# Altium PCB Mini_PD.PcbDoc
Units mil, origin at the board's own origin, x right, y up, seen from the top; angles counter-clockwise.
Board outline 551.18 x 429.13 mil, 2 copper layers (Top Layer, Bottom Layer); 9 components, 9 nets, 70 pads, 9 vias.
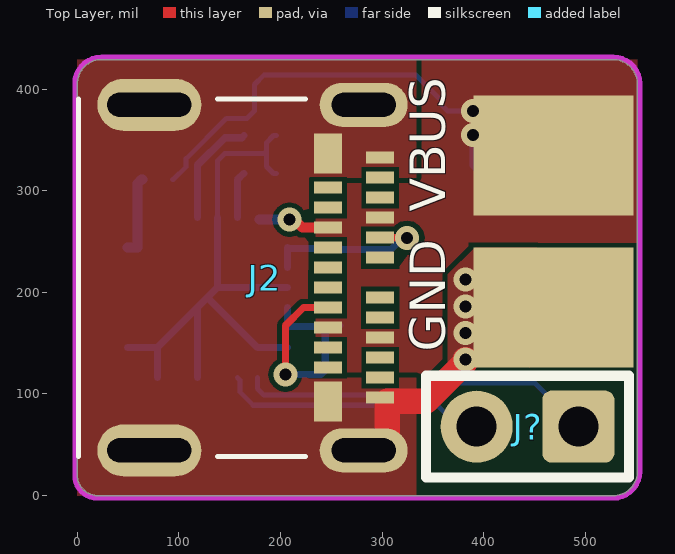
[diagram p0: Top Layer view]
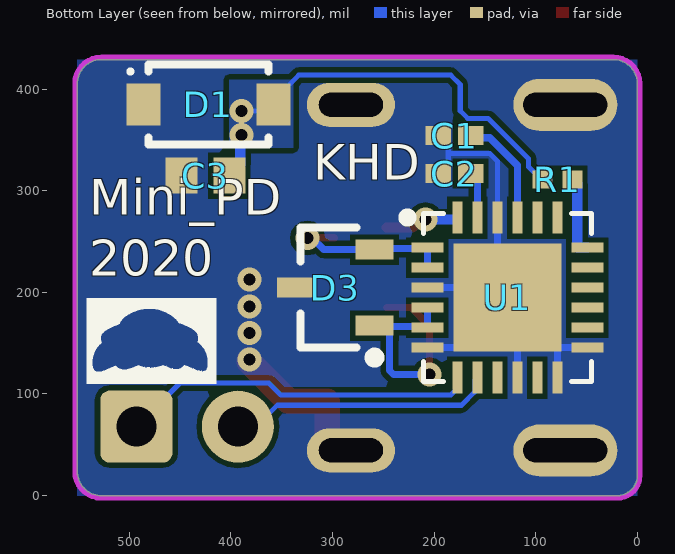
[diagram p1: Bottom Layer view, seen from below]
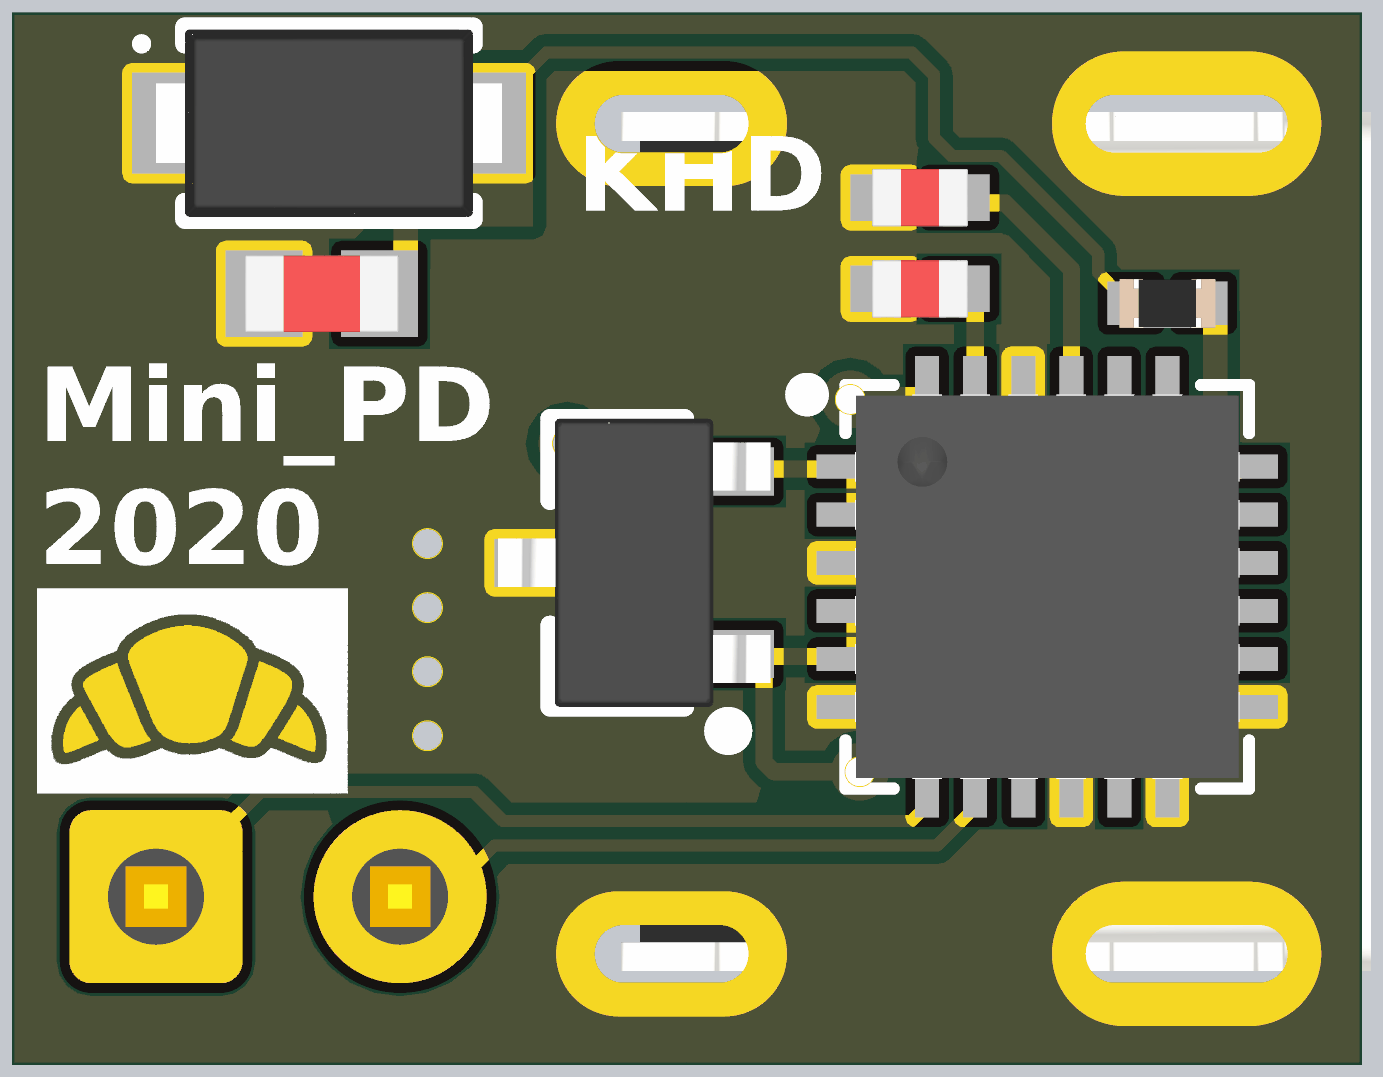
[diagram p2: 3D render of the assembled board from below, using the file's embedded part models]

## Layer stack, top to bottom
Top Solder: solder mask 0.4, Solder Resist, Dk 3.5
Top Layer: signal copper 1.4
Dielectric 1: dielectric 12.6, FR-4, Dk 4.8
Bottom Layer: signal copper 1.4
Bottom Solder: solder mask 0.4, Solder Resist, Dk 3.5

## Board outline
19.68,0 527.56,0 ccw(c527.56,23.62) 551.18,23.62 551.18,405.51 ccw(c527.56,405.51) 527.56,429.13 23.62,429.13 ccw(c23.62,405.52) 0,405.51 0,19.69 ccw(c19.68,19.68)

## Design rules (kind name [scope] priority, off if disabled: settings)
Clearance [All] p1: gap=5 ignorepadtopadclearanceinfootprint=FALSE
PolygonConnect PolygonConnect_1 [All vs IsNamedPolygon('NONET_L-01_P-001')] p1: connectstyle=Direct reliefconductorwidth=10 reliefentries=4 polygonreliefangle="90 Angle" airgapwidth=10
PolygonConnect [All] p2: connectstyle=Relief reliefconductorwidth=10 reliefentries=4 polygonreliefangle="90 Angle" airgapwidth=10
RoutingVias [All] p1: holewidth=19.68 width=31.5 viastyle="Through Hole" minholewidth=11.81 minwidth=23.62 maxholewidth=15.75 maxwidth=27.56
SolderMaskExpansion [All] p1: expansion=4 istentingtop=FALSE
Width [All] p1: maxlimit=25 minlimit=5 preferedwidth=7
30 further rules are at their usual default settings.

## Components (designator, comment, footprint, x,y, rotation, side; value= is the part's Value field where it differs from the comment)
C1 "C0402 1uF 6.3V X7R" C0402-HIGH-DENSITY 180.12,354.33 r180 bottom value=1uF
C2 "C0402 1uF 6.3V X7R" C0402-HIGH-DENSITY 180.12,316.93 r180 bottom value=1uF
C3 "4.7uF, 25V, X5R, 0603" C0603-HIGH-DENSITY 425.2,314.96 r180 bottom value=4.7uF
D1 "SMF22A" SOD-123F 422.24,384.84 r180 bottom value=24.4V
D3 "ESDA25L" SOT23-3L 297.24,204.72 r0 bottom
J2 "USB C" "Molex USB-C" 149.61,214.57 r270 top
J? "Header 1X2" "Header 1x2 TH Pitch 2.54mm" 493.11,67.91 r180 top
R1 "R0402 1k 1%" R0402-HIGH-DENSITY 78.74,311.02 r0 bottom value=1k
U1 "STUSB4500" "QFN24 - 4X4MM - PITCH 0.5MM - EXPOSEDPAD" 127.95,194.88 r180 bottom

## Footprints (in the part's own frame and the unit in brackets; to place one, negate y for a bottom-side part, rotate by r counter-clockwise, add the part's x,y. Pads: shape width x height; smd on the part's side, far side on the other; paste and mask are expansions set on the pad)
C0402-HIGH-DENSITY [mil] "Chip Capacitor, 2-Leads, Body 1.02x0.51mm, IPC High Density"
  rect 25x19 smd: 1(-16,0) 2(16,0)
  body extent -20,-12 20,12, height 8
C0603-HIGH-DENSITY [mm] "Chip Capacitor, 2-Leads, Body 1.60x0.80mm, IPC High Density"
  rect 0.8x0.9 smd: 1(-0.6,0) 2(0.6,0)
  body extent -0.8,-0.4 0.8,0.4, height 0.3
"Header 1x2 TH Pitch 2.54mm" [mm] "PinHeader 1x2 TH Pitch 2.54mm"
  rrect25% 1.8x1.8 hole 1: 1(0,0)
  round 1.8 hole 1: 2(2.54,0)
  silkscreen extent -1.27,-1.27 3.81,1.27, body extent -1.27,-1.27 3.81,1.27, height 9.5
"Molex USB-C" [mm] "MOLEX_105450-0101"
  rect 0.3x0.7 smd: A1(-3,3.77) A2(-2.5,3.77) A3(-2,3.77) A4(-1.5,3.77) A5(-1,3.77) A6(-0.5,3.77) A7(0.5,3.77) A8(1,3.77) A9(1.5,3.77) A10(2,3.77) A11(2.5,3.77) A12(3,3.77) B2(2.25,2.47) B3(1.75,2.47) B4(1.25,2.47) B5(0.75,2.47) B6(0.25,2.47) B7(-0.25,2.47) B8(-0.75,2.47) B9(-1.25,2.47) B10(-1.75,2.47) B11(-2.25,2.47)
  rect 1x0.7 smd: B1(3.1,2.47) B12(-3.1,2.47)
  oval 1.1x2.2 hole 0.6 slot 1.6 at 90 deg: S1(-4.32,3.36) S2(4.32,3.36)
  oval 1.3x2.6 hole 0.6 slot 2.1 at 90 deg: S3(-4.32,-2) S4(4.32,-2)
  silkscreen extent -4.47,-3.77 4.47,1.9, body extent -4.44,-3.92 4.5,3.98, height 3.22
"QFN24 - 4X4MM - PITCH 0.5MM - EXPOSEDPAD" [mm] "QFN24 - 4X4mm - pitch 0.5mm - ExposedPAD"
  rect 2.7x2.7 smd: 0(0,0)
  rect 0.8x0.25 smd: 1(-2,1.25) 2(-2,0.75) 3(-2,0.25) 4(-2,-0.25) 5(-2,-0.75) 6(-2,-1.25) 13(2,-1.25) 14(2,-0.75) 15(2,-0.25) 16(2,0.25) 17(2,0.75) 18(2,1.25)
  rect 0.25x0.8 smd: 7(-1.25,-2) 8(-0.75,-2) 9(-0.25,-2) 10(0.25,-2) 11(0.75,-2) 12(1.25,-2) 19(1.25,2) 20(0.75,2) 21(0.25,2) 22(-0.25,2) 23(-0.75,2) 24(-1.25,2)
  silkscreen extent -2.6,-2.1 2.1,2.1, body extent -2,-2 2,2, height 1
R0402-HIGH-DENSITY [mm] "Chip Resistor, 2-Leads, Body 1.00x0.50mm, IPC High Density"
  rect 0.5x0.45 smd: 1(-0.375,0) 2(0.375,0)
  body extent -0.5,-0.26 0.5,0.25, height 0.34
SOD-123F [mm] "SODFL, 2-Leads, Body 1.72x3.60mm, IPC High Density"
  rect 0.85x1.05 smd: A(-1.625,0) K(1.625,0)
  silkscreen extent -2,-1 1.5,1, body extent -1.8,-0.98 1.8,0.97, height 1.08
SOT23-3L [mm] "SOT23, 3-Leads, Body 2.90x2.55mm, Pitch 0.95mm, IPC Medium Density"
  rect 0.95x0.5 smd: 1(-0.98,0.95) 2(-0.98,-0.95) 3(0.98,0)
  silkscreen extent -1.1,-1.5 0.87,1.87, body extent -1.42,-1.5 1.42,1.5, height 1.2

## Part data
C1 C2: "Chip Capacitor, 0402, 1uF, 6.3V, X7R", Max. Voltage=6.3V, Supplier Part Number 1=490-13339-1-ND, EIA Code=X7R, Supplier 1=Digi-Key
C3: library part "C0603 4.7uF 25V X5R", "Chip Capacitor, 0603, 4.7uF, 25V, X5R", Max. Voltage=25V, Supplier Part Number 1=490-7203-1-ND, EIA Code=X5R, Supplier 1=Digi-Key, Supplier 2=Mouser, Supplier 3=LCSC, Supplier Part Number 2=81-GRM188R61E475KE1D, Supplier Part Number 3=C90057
D1: "Unidirectional 22V 24.4V 35.5V 5.6A SOD-123F TVS RoHS", Manufacturer="Littlefuse Inc.", Supplier Part Number 1=F5822CT-ND, Manufacturer’s ordering code=SMF22A, Part Number=SMF22A, Supplier 1=Digi-Key, Supplier 2=Mouser, Supplier 3=LCSC, Supplier Part Number 2=576-SMF22A, Supplier Part Number 3=C169431
D3: "Dual Transil Array For ESD Protection in SOT23-3 Vbr = 25V", Manufacturer=STMicroelectronics, Supplier Part Number 1=497-4642-1-ND, Manufacturer Part Number=ESDA25L, Supplier 1=Digi-Key, Supplier 2=Mouser, Supplier 3=LCSC, Supplier Part Number 2=511-ESDA25L, Supplier Part Number 3=C95343
J2: "USB-C USB 3.1 Gen 2, Superspeed+_ Receptacle Connector 24 Position Surface Mount, Right Angle; Through Hole", Package=None, Supplier Part Number 1=WM12856CT-ND, Digi-Key_Part_Number=WM12856CT-ND, Digi-Key_Purchase_URL=https://www.digikey.tw/product-detail/en/molex/1054500101/WM12856CT-ND/5843891?utm_source=snapeda&utm_medium=aggregator&utm_campaign=symbol, MF=Molex, MP=1054500101, SnapEDA_Link=https://www.snapeda.com/parts/1054500101/Molex/view-part/448528/?ref=snap, Supplier 1=Digi-Key, Supplier 2=Mouser, Supplier 3=LCSC, Supplier Part Number 2=538-105450-0101, Supplier Part Number 3=C134092
R1: "Chip Resistor, 0402, 1k ohms, 1%, 1/16 W", Supplier Part Number 1=311-1.00KLRCT-ND, Supplier 1=Digi-Key
U1: library part STUSB4500QTR, "Standalone USB PD controller  with SINK auto-run mode in QFN24 4x4mm", Manufacturer=STMicroelectronics, Supplier Part Number 1=497-18060-1-ND, Manufacturer’s ordering code=STUSB4500QTR, Part Number="Standalone USB PD controller  with SINK auto-run mode in QFN24 4x4mm", Supplier 1=Digi-Key, Supplier 2=Mouser, Supplier Part Number 2=511-STUSB4500QTR

## Free pads (board coordinates)
  rect 157.48x118.11 smd: 2(468.5,185.04) 2(468.5,334.65)

## Via types
v1: diameter 23.62, hole 11.81, Top Layer to Bottom Layer, tented both sides, 9 vias

## Nets (pads, with @x,y where several pads share a name; then routed paths per layer and width w, separated by ;. In a path a pad name is that pad's centre, name@x,y a point inside that pad or via, vN(x,y) a via of type N, cw(c..) or ccw(c..) an arc to the next point about the centre after c; other vN are vias at no path point)
CC1: D3.2 J2.A5 U1.1 U1.2 | length 170.2
  Top Layer w7: J2.A5 298.2,253.77 324.41,253.77 v1(324.58,253.6)
  Bottom Layer w7: U1.2 U1.1 207.68,243.11 258.17,243.11 258.66,243.6 260.14,242.13 308.61,242.13 320.08,253.6 v1(324.58,253.6)
CC2: D3.1 J2.B5 U1.4 U1.5 | length 256.2
  Top Layer w7: v1(204.72,119.09) 204.72,167.19 222.57,185.04 J2.B5
  Bottom Layer w7: v1(204.72,119.09) 239.9,119.09 244,123.2 244,161.52 D3.1@248.82,166.34 ; U1.4 U1.5 207.68,166.34 D3.1@248.82,166.34 ; D3.1 257.68,166.34 D3.1@248.82,166.34
GND: C1.1 C2.1 C3.1 D1.A D3.3 J2.A1 J2.A12 J2.B1 J2.B12 J2.S1 J2.S2 J2.S3 J2.S4 pad.2@468.5,185.04 U1.0 U1.3 U1.6 U1.10 U1.12 U1.13 U1.22 | length 767.1
  Top Layer w25: J2.S2 296.56,44.49 305.02,52.95 305.02,92.74 343.07,92.74 381.89,131.55 v1(381.89,133.86)
  Bottom Layer w5: U1.22 137.79,329.22 145.2,336.63 184.17,336.63 186.12,338.57 ; C2.1 193.12,316.93 186.12,323.93 186.12,338.57 ; C1.1 193.12,354.33 186.12,347.33 186.12,338.57
  Bottom Layer w7: U1.13 U1.0@78.74,145.67 ; U1.12 U1.0@78.74,145.67 ; U1.10 U1.0@118.11,185.04 ; U1.22 U1.0@137.79,204.72 ; U1.6 177.17,145.67 U1.0 ; U1.3 U1.0@137.8,204.72 ; U1.0@78.74,145.67 U1.0@118.11,185.04 ; U1.0@118.11,185.04 U1.0 ; U1.0 U1.0@137.79,204.72
  other v1: 381.89,160.1 381.89,186.35 381.89,212.6
NetC1_2: C1.2 U1.21 | length 109.6
  Bottom Layer w7: U1.21 118.11,325.09 145.22,352.2 161.99,352.2 C1.2
NetC2_2: C2.2 U1.23 | length 46.4
  Bottom Layer w7: U1.23 157.48,310.93 163.48,316.93 C2.2
NetR1_1: R1.1 U1.18 | length 79.4
  Bottom Layer w10: U1.18 59.05,244.09 59.13,244.17 59.13,307.17 62.99,311.02 R1.1
SCL: J?.1 U1.7 | length 352.2
  Bottom Layer w5: U1.7 177.17,105.32 179.59,102.89 183.58,98.9 350.87,98.9 362.81,110.85 375.33,110.85 450.18,110.85 J?.1
SDA: J?.2 U1.8 | length 262.4
  Bottom Layer w5: U1.8 159.9,113.72 159.9,102.13 173.13,88.9 354.3,88.9 375.29,67.91 J?.2
VBUS: C3.2 D1.K J2.A4 J2.A9 J2.B4 J2.B9 pad.2@468.5,334.65 R1.2 U1.24 | length 488.2
  Top Layer w10: v1(208.66,271.65) 213.7,271.65 221.57,263.78 J2.B9
  Bottom Layer w5: R1.2 94.49,311.02 107.11,323.65 107.11,331.52 146.92,371.33 166.99,371.33 174.32,378.66 174.32,404.56 183.56,413.8 333.25,413.8 358.27,388.78 D1.K 364.58,378.53 v1(389.58,378.53) ; U1.24 U1.24@179.13,271.65
  Bottom Layer w10: U1.24@179.13,271.65 v1(208.66,271.65) ; v1@391.58,348.84 390.83,348.84 390.83,325.71 C3.2
  other v1: 389.66,355.13
pads on no net: J2.A2 J2.A3 J2.A6 J2.A7 J2.A8 J2.A10 J2.A11 J2.B2 J2.B3 J2.B6 J2.B7 J2.B8 J2.B10 J2.B11 U1.9 U1.11 U1.14 U1.15 U1.16 U1.17 U1.19 U1.20

## Polygon pours and split planes (outlines as drawn)
GND on Top Layer "NONET_L-01_P-001" (solid, remove dead copper, pour order 0): 444.88,125.98 443.57,127.3 364.75,127.3 364.75,217.85 390.99,244.09 452.76,244.09 468.5,228.35
no net on Top Layer "NONET_L-01_P-001" (solid, pour order 7): 444.88,125.98
GND on Top Layer "NONET_L-01_P-001" (solid, pour order 2): 0,429.13 0,312.99 333.66,312.99 333.66,429.13
GND on Top Layer "NONET_L-01_P-001" (solid, pour order 1): 0,0 0,116.14 0,321.81 227.94,321.86 226.38,116.14 333.66,116.14 333.66,0
VBUS on Top Layer "NONET_L-01_P-001" (solid, remove dead copper, pour order 3): 234.71,429.13 234.71,0 551.18,0 551.18,429.13
no net on Top Layer "NONET_L-01_P-001" (solid, pour order 6): 234.71,156.57
GND on Bottom Layer "NONET_L-01_P-001" (solid, remove dead copper, pour order 5): 0,0 551.18,0 551.18,429.13 0,429.13
VBUS on Bottom Layer "NONET_L-01_P-001" (solid, pour order 4): 401.57,342.52 338.58,342.52 338.58,409.45 401.57,409.45

## Keep-outs
Keep-Out Layer:
  lines w5: -2.5,405.52 ccw(c23.62,405.52) -2.5,405.51 ; -2.5,405.52 cw(c23.62,405.52) 23.6,431.63 ; -2.5,405.51 -2.5,405.52 ; -2.5,405.51 -2.5,19.69 ccw(c19.68,19.68) 19.68,-2.5 ; 19.68,-2.5 ccw(c19.68,19.68) 19.68,-2.5 ; 19.68,-2.5 527.56,-2.5 ccw(c527.56,23.62) 553.68,23.58 ; 19.68,-2.5 19.68,-2.5 ; 23.62,431.63 ccw(c23.62,429.13) 23.6,431.63 ; 23.62,431.63 ccw(c23.62,405.52) 23.6,431.63 ; 23.62,431.63 527.56,431.63 ; 527.56,431.63 cw(c527.56,405.51) 527.58,431.63 ; 527.56,431.63 cw(c527.56,429.13) 527.58,431.63 ; 527.58,431.63 cw(c527.56,405.51) 553.68,405.54 ; 553.68,23.58 ccw(c551.18,23.62) 553.68,23.62 ; 553.68,23.58 ccw(c527.56,23.62) 553.68,23.62 ; 553.68,23.62 ccw(c551.18,23.62) 553.68,23.62 ; 553.68,23.62 ccw(c527.56,23.62) 553.68,23.62 ; 553.68,23.62 553.68,405.51 ; 553.68,405.51 ccw(c551.18,405.51) 553.68,405.54 ; 553.68,405.51 ccw(c527.56,405.51) 553.68,405.54 ; 553.68,405.51 ccw(c527.56,405.51) 553.68,405.51

## Silkscreen, mask and mechanical layers (free items; w line width, h text height)
Top Overlay:
  text "VBUS" at 374.02,279.53 h60 r90
  text "GND" at 374.02,141.73 h60 r90
Bottom Overlay:
  region: 759 vertices and 1 holes, not listed, extent 414.5,110.25 541.82,194.24
  text "KHD" at 318.9,299.21 h60
  text "Mini_PD / 2020" at 539.37,204.72 h60
Bottom Solder:
  drawing of 5 lines, arcs and shapes, not listed